# Altium PCB 12·channel amplifier.PcbDoc
Units mil, origin at the board's own origin, x right, y up, seen from the top; angles counter-clockwise.
Board outline 3455.01 x 2935.52 mil, 2 copper layers (Top Layer, Bottom Layer); 153 components, 120 nets, 438 pads, 94 vias.
Unrouted connection lines stored in the file: 39.
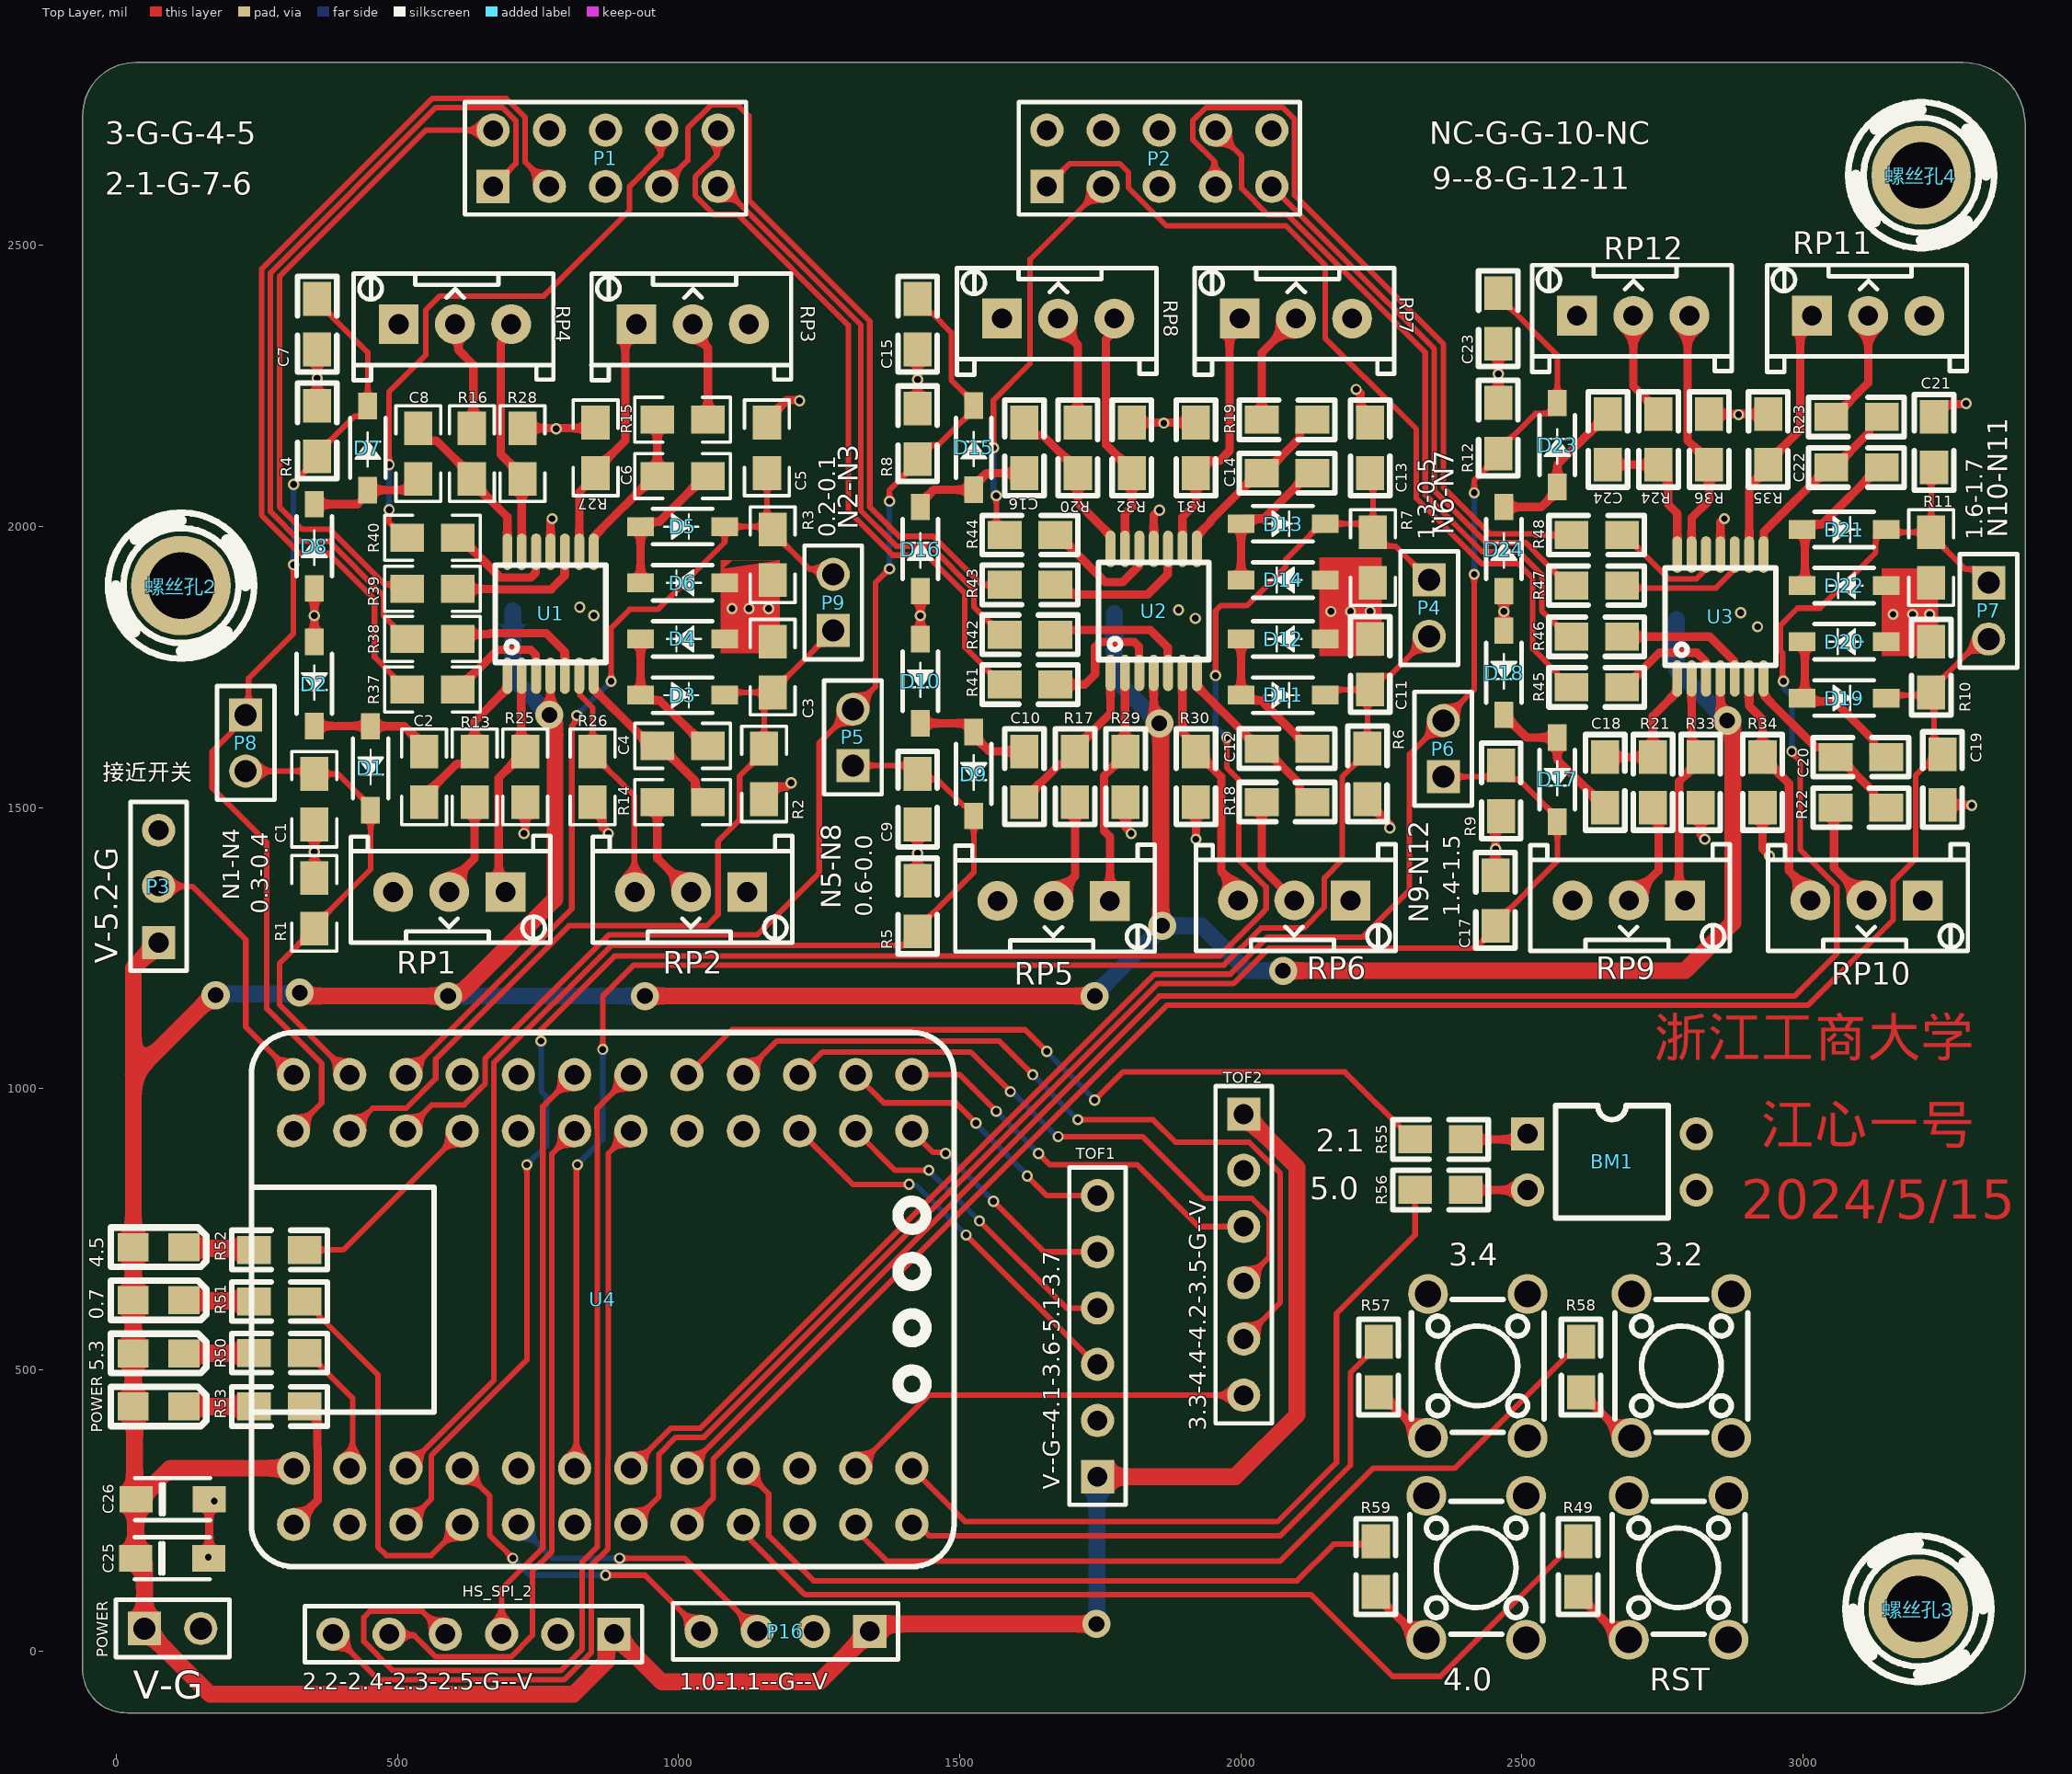
[diagram p0: Top Layer view]
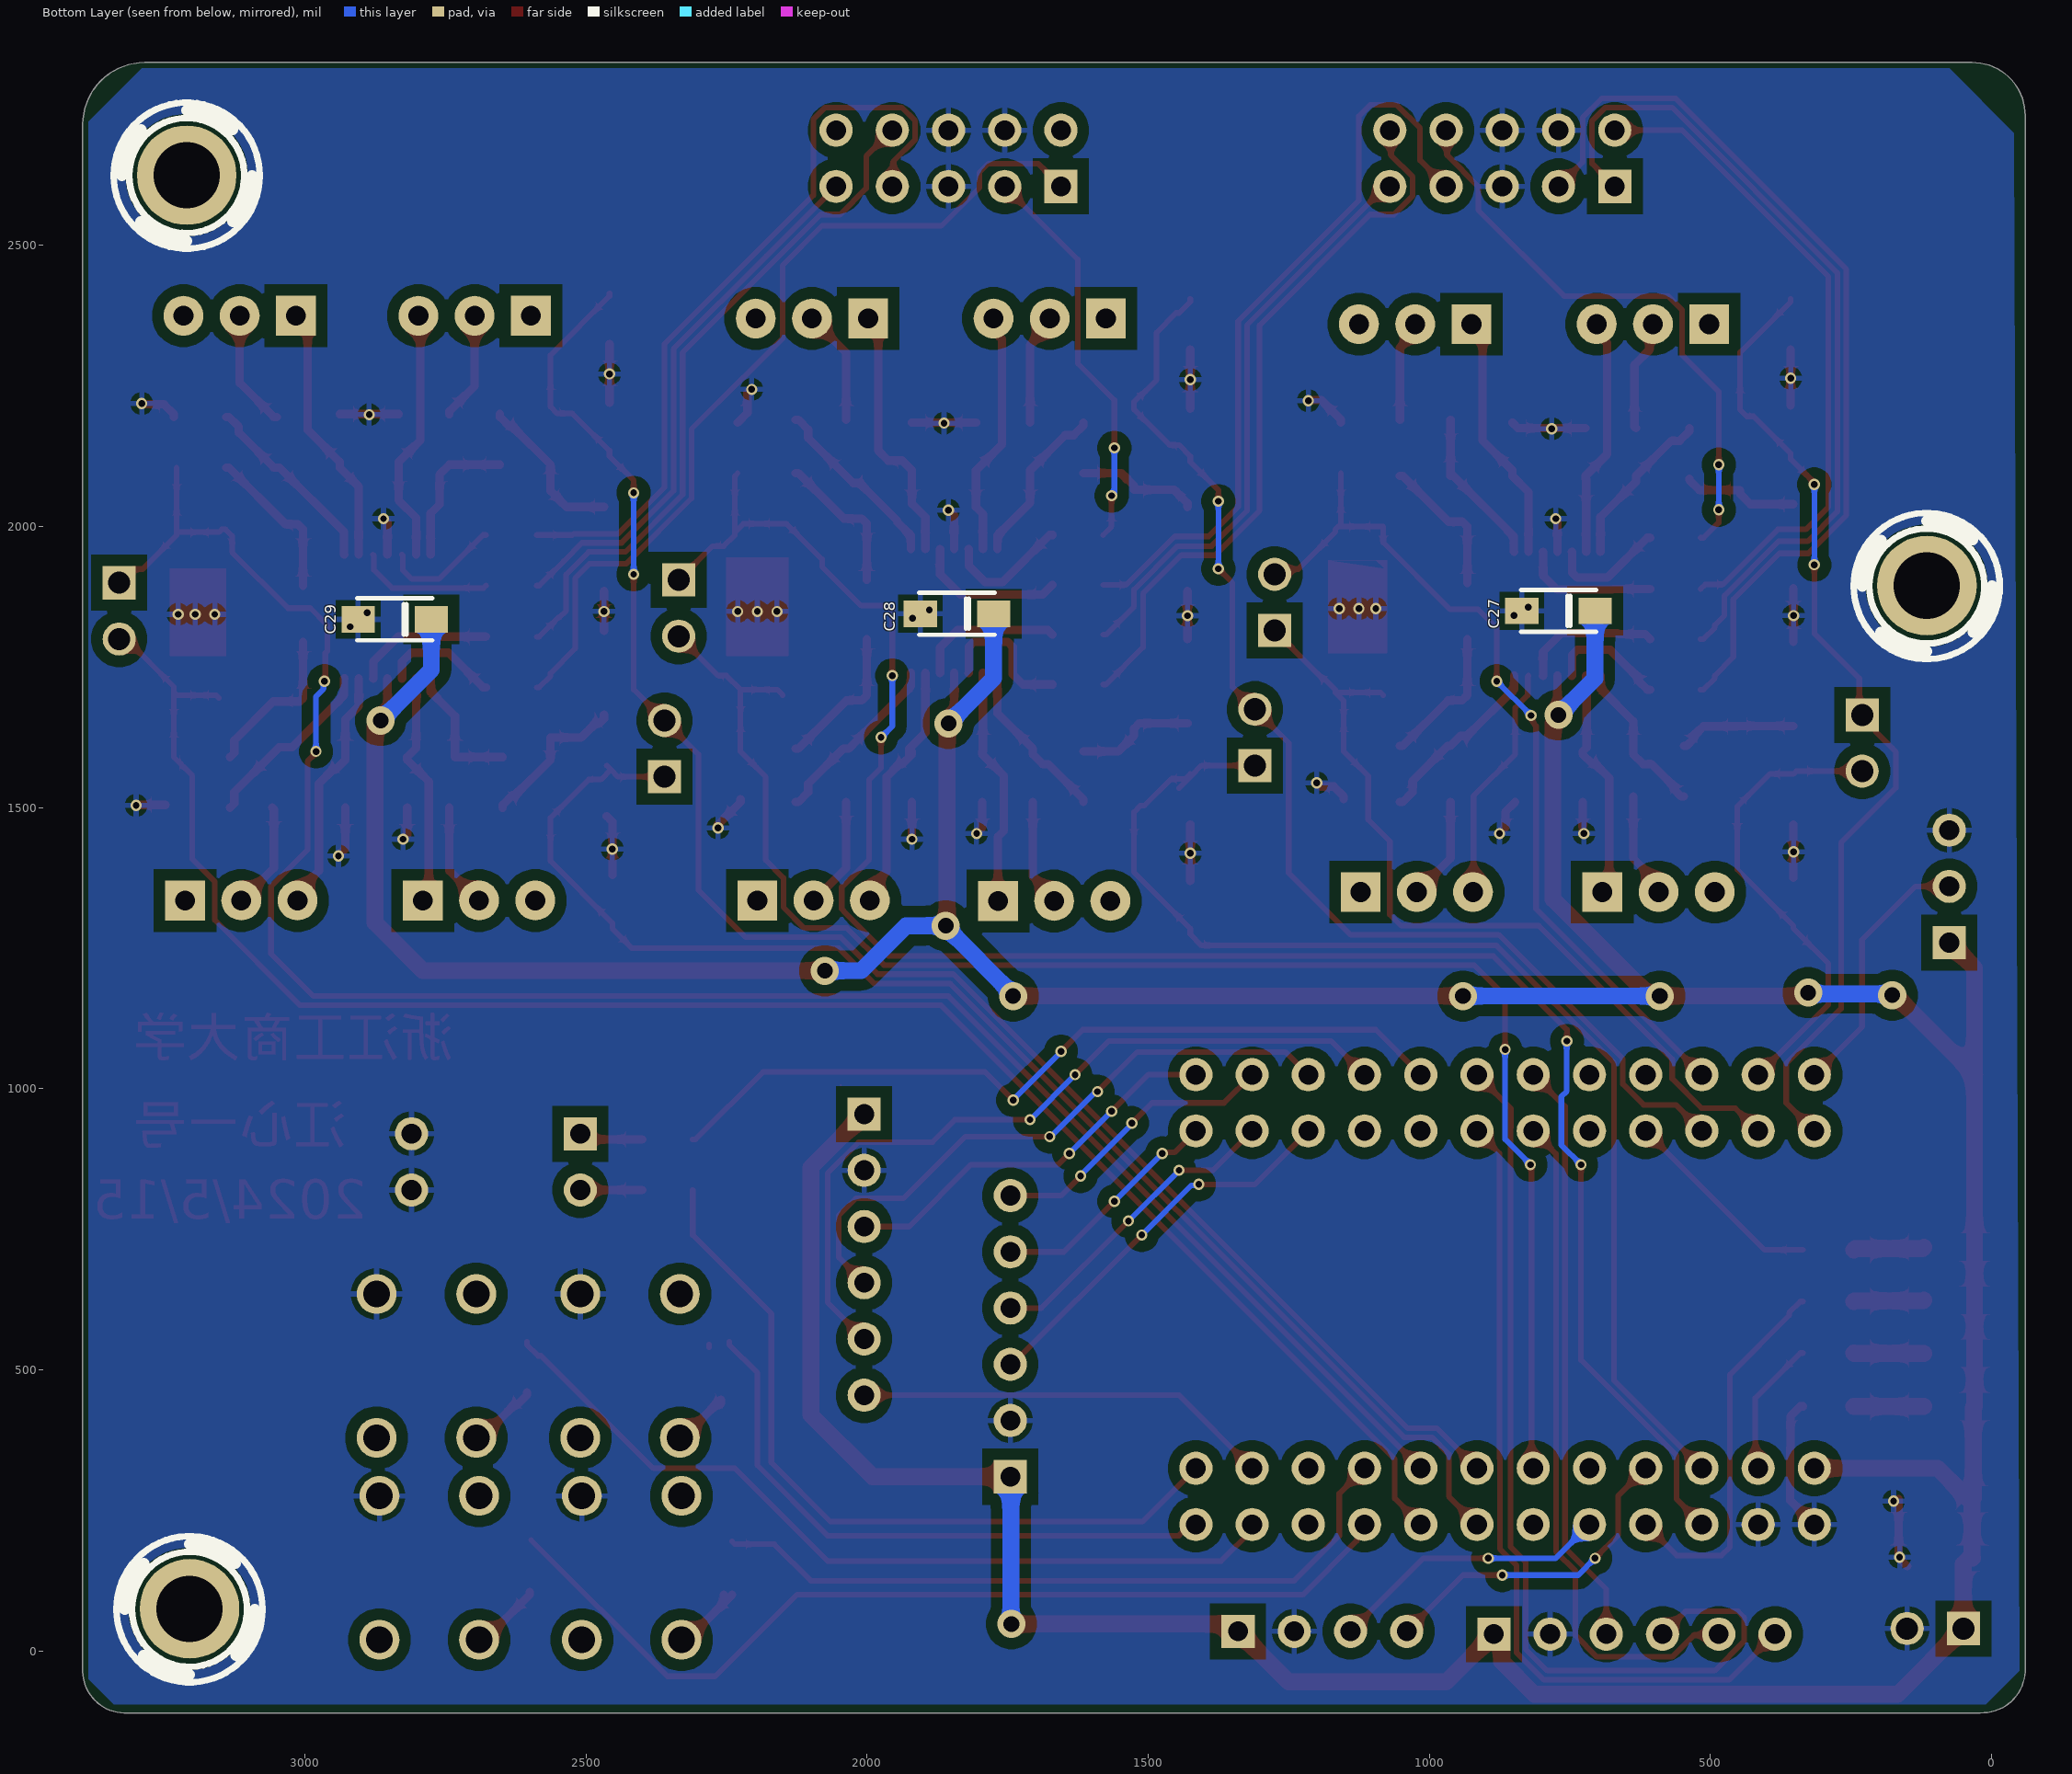
[diagram p1: Bottom Layer view, seen from below]
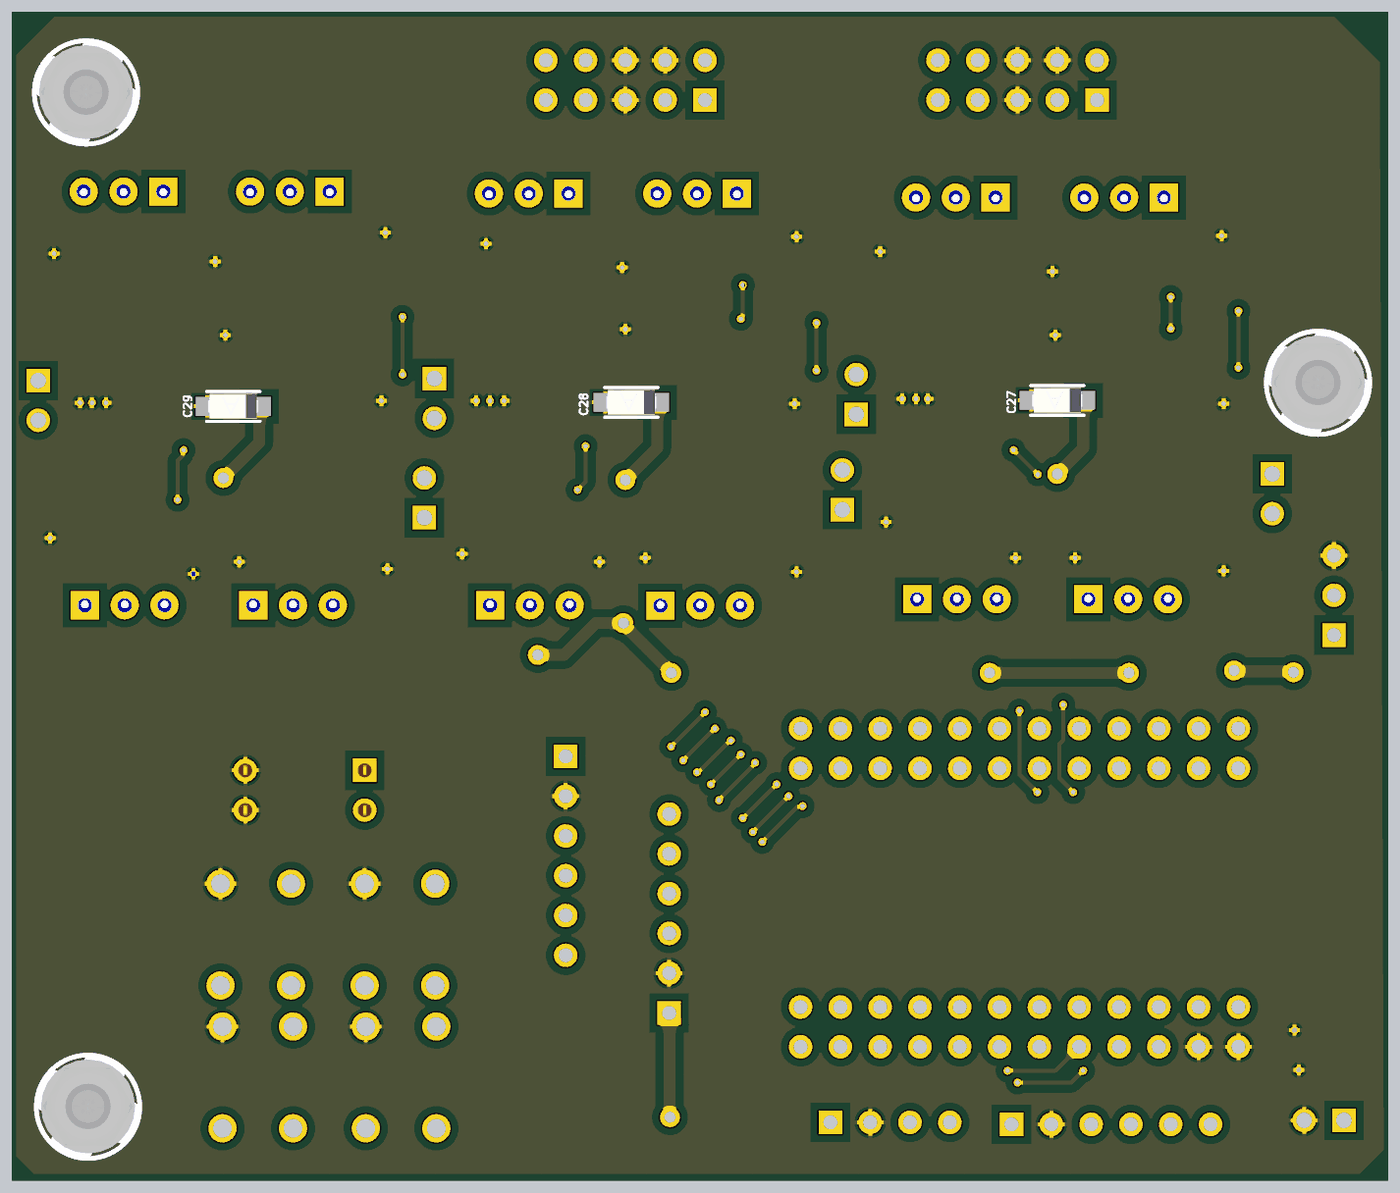
[diagram p2: 3D render of the assembled board from below, using the file's embedded part models]

## Layer stack, top to bottom
Top Solder: solder mask 0.4, Solder Resist, Dk 3.5
Top Layer: signal copper 1.4
Dielectric 1: dielectric 12.6, FR-4, Dk 4.8
Bottom Layer: signal copper 1.4
Bottom Solder: solder mask 0.4, Solder Resist, Dk 3.5

## Board outline
-60,-30 ccw(c16.79,-33.21) 20,-110 3315,-110 ccw(c3319.64,-34.64) 3395,-30 3395,2715.51 ccw(c3284.17,2714.68) 3285,2825.51 35,2825.51 ccw(c33.75,2731.76) -60,2730.51 -60,2725.92

## Design rules (kind name [scope] priority, off if disabled: settings)
Clearance [All] p1: gap=6 ignorepadtopadclearanceinfootprint=TRUE
PolygonConnect [All] p1: connectstyle=Relief reliefconductorwidth=10 reliefentries=4 polygonreliefangle="90 Angle" airgapwidth=10
RoutingVias [All] p1: holewidth=28 width=50 viastyle="Through Hole" minholewidth=28 minwidth=50 maxholewidth=28 maxwidth=50
SMDNeckDown [All] p1: percent=50.000
SolderMaskExpansion [All] p1: expansion=4 istentingtop=FALSE
UnRoutedNet [All] p1: checkbadconnections=TRUE
Width Width_1 [InNetClass('net')] p1: maxlimit=30 minlimit=10 preferedwidth=20
Width VCC [InNetClass('VCC')] p2: maxlimit=50 minlimit=10 preferedwidth=30
29 further rules are at their usual default settings.

## Components (designator, comment, footprint, x,y, rotation, side; value= is the part's Value field where it differs from the comment)
0.7 "蓝色贴片LED" 0805LED 30,623.89 r0 top (schematic designator STA2)
3.2 "TS665CJ" 圆形按键 2872.15,379.11 r90 top (schematic designator S2)
3.4 "TS665CJ" 圆形按键 2510,379.11 r90 top (schematic designator S1)
4.0 "TS665CJ" 圆形按键 2507.15,20 r90 top (schematic designator S3)
4.5 "蓝色贴片LED" 0805LED 30,718.33 r0 top (schematic designator STA3)
5.3 "蓝色贴片LED" 0805LED 30,529.44 r0 top (schematic designator STA1)
BM1 "SW DIP-2" BoMa2 2670,860 r270 top
C1 "Cap" 0805#1 352.1,1515 r270 top value=0.1uF
C2 "Cap" 0805#1 547.1,1555 r90 top value=0.1uF
C3 "Cap" 0805#1 1167.1,1750 r90 top value=0.1uF
C4 "Cap" 0805#1 1007.1,1610 r180 top value=0.1uF
C5 "Cap" 0805#1 1157.1,2140 r270 top value=0.1uF
C6 "Cap" 0805#1 1007.1,2090 r180 top value=0.1uF
C7 "Cap" 0805#2 357.1,2315 r90 top value=0.1uF
C8 "Cap" 0805#1 537.1,2130 r270 top value=0.1uF
C9 "Cap" 0805#2 1425,1560 r270 top value=0.1uF
C10 "Cap" 0805#2 1615,1510 r90 top value=0.1uF
C11 "Cap" 0805#2 2230,1710 r90 top value=0.1uF
C12 "Cap" 0805#2 2127.04,1605 r180 top value=0.1uF
C13 "Cap" 0805#2 2230,2185 r270 top value=0.1uF
C14 "Cap" 0805#2 2127.04,2095 r180 top value=0.1uF
C15 "Cap" 0805#2 1425,2315 r90 top value=0.1uF
C16 "Cap" 0805#2 1615,2185 r270 top value=0.1uF
C17 "Cap" 0805#2 2452.9,1290 r90 top value=0.1uF
C18 "Cap" 0805#2 2647.9,1590 r270 top value=0.1uF
C19 "Cap" 0805#2 3247.9,1595 r270 top value=0.1uF
C20 "Cap" 0805#2 3147.9,1590 r180 top value=0.1uF
C21 "Cap" 0805#2 3232.9,2195 r270 top value=0.1uF
C22 "Cap" 0805#2 3139.94,2105 r180 top value=0.1uF
C23 "Cap" 0805#2 2457.9,2325 r90 top value=0.1uF
C24 "Cap" 0805#2 2652.9,2110 r90 top value=0.1uF
C25 "104" CAPT3216 99.11,165 r0 top
C26 "106" CAPT3216 99.88,270 r0 top
C27 "104" CAPT3216 770.12,1850 r0 bottom
C28 "104" CAPT3216 1840,1845 r0 bottom
C29 "104" CAPT3216 2840,1835 r0 bottom
D1 "1N5819" SOD-123 452.1,1570 r270 top
D2 "1N5819" SOD-123 352.1,1720.2 r270 top
D3 "1N5819" SOD-123 1007.1,1700 r0 top
D4 "1N5819" SOD-123 1007.1,1800 r180 top
D5 "1N5819" SOD-123 1007.1,2000 r0 top
D6 "1N5819" SOD-123 1007.1,1900 r180 top
D7 "1N5819" SOD-123 447.1,2139.8 r90 top
D8 "1N5819" SOD-123 352.1,1965 r90 top
D9 "1N5819" SOD-123 1525,1560 r270 top
D10 "1N5819" SOD-123 1430,1725 r270 top
D11 "1N5819" SOD-123 2075,1700 r0 top
D12 "1N5819" SOD-123 2075,1800 r180 top
D13 "1N5819" SOD-123 2075,2005 r0 top
D14 "1N5819" SOD-123 2075,1905 r180 top
D15 "1N5819" SOD-123 1525,2140.2 r90 top
D16 "1N5819" SOD-123 1430,1960 r90 top
D17 "1N5819" SOD-123 2562.9,1550 r270 top
D18 "1N5819" SOD-123 2467.9,1740 r270 top
D19 "1N5819" SOD-123 3072.9,1695 r0 top
D20 "1N5819" SOD-123 3072.9,1795 r180 top
D21 "1N5819" SOD-123 3072.9,1995 r0 top
D22 "1N5819" SOD-123 3073.09,1895 r180 top
D23 "1N5819" SOD-123 2562.9,2145 r90 top
D24 "1N5819" SOD-123 2467.9,1960 r90 top
HS_SPI_2 "CON6" HDR1X6 885,30 r180 top
P1 "Header 5X2" HDR2X5 670,2605 r0 top
P2 "Header 5X2" HDR2X5 1655,2605 r0 top
P3 "Header 3" HDR1X3 75,1260 r90 top
P4 "HDR-1X2" CON20VP2R54-1X2TM 2335,1855 r270 top
P5 "HDR-1X2" CON20VP2R54-1X2TM 1310,1625 r90 top
P6 "HDR-1X2" CON20VP2R54-1X2TM 2360,1605 r90 top
P7 "HDR-1X2" CON20VP2R54-1X2TM 3330,1850 r270 top
P8 "HDR-1X2" CON20VP2R54-1X2TM 230,1615 r270 top
P9 "HDR-1X2" CON20VP2R54-1X2TM 1275,1865 r90 top
P16 "Header-D-M 1x4P" HDR1X4 1340,35 r180 top
POWER "蓝色贴片LED" 0805LED 30,435 r0 top (schematic designator STA4)
POWER "HDR-1X2" CON20VP2R54-1X2TM 100,40 r0 top
R1 "47K ±1%" 0805#1 352.1,1330 r270 top value=47K
R2 "47K ±1%" 0805#1 1152.1,1560 r90 top value=47K
R3 "47K ±1%" 0805#1 1167.1,1950 r270 top value=47K
R4 "47K ±1%" 0805#2 357.1,2125 r90 top value=47K
R5 "47K ±1%" 0805#2 1425,1370 r270 top value=47K
R6 "47K ±1%" 0805#2 2225,1515 r90 top value=47K
R7 "47K ±1%" 0805#1 2235,1945 r270 top value=47K
R8 "47K ±1%" 0805#2 1425,2120 r90 top value=47K
R9 "47K ±1%" 0805#2 2462.9,1485 r90 top value=47K
R10 "47K ±1%" 0805#2 3227.9,1795 r270 top value=47K
R11 "47K ±1%" 0805#1 3227.9,1945 r270 top value=47K
R12 "47K ±1%" 0805#2 2457.9,2130 r90 top value=47K
R13 "0R ±1%" 0805#1 637.1,1555 r90 top value=0R
R14 "0R ±1%" 0805#1 1007.1,1510 r0 top value=0R
R15 "0R ±1%" 0805#1 1007.1,2190 r0 top value=0R
R16 "0R ±1%" 0805#1 632.1,2130 r90 top value=0R
R17 "0R ±1%" 0805#2 1705,1510 r90 top value=0R
R18 "0R ±1%" 0805#2 2037.04,1510 r0 top value=0R
R19 "0R ±1%" 0805#2 2127.04,2190 r180 top value=0R
R20 "0R ±1%" 0805#2 1710,2095 r90 top value=0R
R21 "0R ±1%" 0805#2 2732.9,1500 r90 top value=0R
R22 "0R ±1%" 0805#2 3057.9,1500 r0 top value=0R
R23 "0R ±1%" 0805#2 3139.94,2195 r180 top value=0R
R24 "0R ±1%" 0805#2 2742.9,2110 r90 top value=0R
R25 "1K ±1%" 0805#1 727.1,1555 r90 top value=1K
R26 "1K ±1%" 0805#1 847.1,1555 r90 top value=1K
R27 "1K ±1%" 0805#1 852.1,2140 r90 top value=1K
R28 "1K ±1%" 0805#1 722.1,2130 r90 top value=1K
R29 "1K ±1%" 0805#2 1795,1510 r90 top value=1K
R30 "1K ±1%" 0805#2 1920,1510 r90 top value=1K
R31 "1K ±1%" 0805#2 1920,2095 r90 top value=1K
R32 "1K ±1%" 0805#2 1806,2095 r90 top value=1K
R33 "1K ±1%" 0805#2 2817.9,1500 r90 top value=1K
R34 "1K ±1%" 0805#2 2927.9,1500 r90 top value=1K
R35 "1K ±1%" 0805#2 2937.9,2110 r90 top value=1K
R36 "1K ±1%" 0805#2 2832.9,2110 r90 top value=1K
R37 "5.1K ±1%" 0805#1 562.1,1710 r0 top value=5.1K
R38 "5.1K ±1%" 0805#1 562.1,1800 r0 top value=5.1K
R39 "5.1K ±1%" 0805#1 562.1,1889.11 r180 top value=5.1K
R40 "5.1K ±1%" 0805#1 562.1,1980 r180 top value=5.1K
R41 "5.1K ±1%" 0805#2 1580,1719.11 r0 top value=5.1K
R42 "5.1K ±1%" 0805#2 1580,1807.74 r0 top value=5.1K
R43 "5.1K ±1%" 0805#2 1670,1896.37 r180 top value=5.1K
R44 "5.1K ±1%" 0805#2 1670,1985 r180 top value=5.1K
R45 "5.1K ±1%" 0805#2 2587.9,1714.11 r0 top value=5.1K
R46 "5.1K ±1%" 0805#2 2587.9,1804.11 r0 top value=5.1K
R47 "5.1K ±1%" 0805#2 2677.9,1895 r180 top value=5.1K
R48 "5.1K ±1%" 0805#2 2677.9,1985 r180 top value=5.1K
R49 "470R ±1%" 0805#2 2600,195 r270 top value=470R
R50 "2K ±1%" 0805#2 335,530 r180 top value=2K
R51 "2K ±1%" 0805#2 335,621.67 r180 top value=2K
R52 "2K ±1%" 0805#2 335,713.33 r180 top value=2K
R53 "2K ±1%" 0805#2 335,435 r180 top value=2K
R55 "470R ±1%" 0805#2 2310,910 r0 top value=470R
R56 "470R ±1%" 0805#2 2310,820 r0 top value=470R
R57 "470R ±1%" 0805#2 2245,550 r270 top value=470R
R58 "470R ±1%" 0805#2 2605,550 r270 top value=470R
R59 "470R ±1%" 0805#2 2240,195 r270 top value=470R
RP1 "100K" RESPOT3296 692.1,1350 r180 top
RP2 "100K" RESPOT3296 1122.1,1350 r180 top
RP3 "100K" RESPOT3296 925,2360 r0 top
RP4 "100K" RESPOT3296 502.1,2360 r0 top
RP5 "100K" RESPOT3296 1767.1,1334.11 r180 top
RP6 "100K" RESPOT3296 2195,1335 r180 top
RP7 "100K" RESPOT3296 1997.89,2370 r0 top
RP8 "100K" RESPOT3296 1575,2370 r0 top
RP9 "100K" RESPOT3296 2790,1335 r180 top
RP10 "100K" RESPOT3296 3212.9,1335 r180 top
RP11 "100K" RESPOT3296 3015.8,2375 r0 top
RP12 "100K" RESPOT3296 2597.9,2375 r0 top
RST "TS665CJ" 圆形按键 2867.15,20 r90 top
TOF1 "CON6" HDR1X6 1745,310 r90 top
TOF2 "CON6" HDR1X6 2005,955 r270 top
U1 "OPA4377" TSSOP14 772.1,1845 r0 top
U2 "OPA4377" TSSOP14 1845,1850 r0 top
U3 "OPA4377" TSSOP14 2852.9,1840 r0 top
U4 "STC32F_48P_CoreBoard" STC32F_48P 865,625 r90 top
螺丝孔2 "Scrow" LQ_SCROW3_5mm 115,1895 r0 top
螺丝孔3 "Scrow" LQ_SCROW3_5mm 3205,75 r0 top
螺丝孔4 "Scrow" LQ_SCROW3_5mm 3210,2625 r0 top

## Footprints (in the part's own frame and the unit in brackets; to place one, negate y for a bottom-side part, rotate by r counter-clockwise, add the part's x,y. Pads: shape width x height; smd on the part's side, far side on the other; paste and mask are expansions set on the pad)
0805#1 [mil]
  rect 60x50 smd: 1(-45,0) 2(45,0)
  silkscreen extent -85,-40 85,40
0805#2 [mil]
  rect 60x50 smd: 1(0,0) 2(90,0)
  silkscreen extent -40,-35 130,35
0805LED [mil]
  rect 55x50 smd: A(0,0) C(90,0)
  silkscreen extent -40,-35 130,35
BoMa2 [mm]
  rect 1.5x1.5 hole 0.9: 1(-1.524,-4.064)
  round 1.5 hole 0.9: 2(1.016,-4.064) 3(1.016,3.556) 4(-1.524,3.556)
  silkscreen extent -2.79,-2.79 2.29,2.29, body extent -3.52,-5.2 3.02,4.7, height 6.8
CAPT3216 [mm]
  rect 1.5x1.2 smd: 1(-1.654,0) 2(1.654,0)
  silkscreen extent -1.7,-0.95 1.7,0.95, body extent -1.6,-0.8 1.6,0.8, height 1.6
CON20VP2R54-1X2TM [mm]
  rect 1.5x1.5 hole 1: 1(-1.27,0)
  round 1.5 hole 1: 2(1.27,0)
  silkscreen extent -2.57,-1.3 2.57,1.3
HDR1X3 [mm] "Connector; Header; 3 Position"
  rect 1.5x1.5 hole 0.9: 1(0,0)
  round 1.5 hole 0.9: 2(2.54,0) 3(5.08,0)
  silkscreen extent -1.27,-1.27 6.35,1.27
HDR1X4 [mm] "Connector; Header; 4 Position"
  rect 1.5x1.5 hole 0.9: 1(0,0)
  round 1.5 hole 0.9: 2(2.54,0) 3(5.08,0) 4(7.62,0)
  silkscreen extent -1.27,-1.27 8.89,1.27
HDR1X6 [mm] "Connector; Header; 6 Position"
  rect 1.5x1.5 hole 0.9: 1(0,0)
  round 1.5 hole 0.9: 2(2.54,0) 3(5.08,0) 4(7.62,0) 5(10.16,0) 6(12.7,0)
  silkscreen extent -1.27,-1.27 13.97,1.27
HDR2X5 [mm] "Connector; Header; 5x2 Position"
  rect 1.5x1.5 hole 0.9: 1(0,0)
  round 1.5 hole 0.9: 2(0,2.54) 3(2.54,0) 4(2.54,2.54) 5(5.08,0) 6(5.08,2.54) 7(7.62,0) 8(7.62,2.54) 9(10.16,0) 10(10.16,2.54)
  silkscreen extent -1.27,-1.27 11.43,3.81
LQ_SCROW3_5mm [mm]
  round 4.5 hole 3: 1(0,0)
  silkscreen extent -3.3,-3.3 3.3,3.3, body extent -3,-3 3,3, height 1.3
RESPOT3296 [mm] "Thru-Hole; 3 Leads"
  rect 1.8x1.8 hole 0.9: 1(0,0)
  round 1.8 hole 0.9: 2(2.54,0) 3(5.08,0)
  silkscreen extent -2.03,-2.54 6.98,2.29, body extent -2.06,-2.44 7.14,2.36, height 12.46
SOD-123 [mm]
  rect 1.2x0.85 smd: A(-1.9,0) K(1.9,0)
  silkscreen extent -1.35,-0.8 1.35,0.8, body extent -1.85,-0.8 1.85,0.8, height 1.2
STC32F_48P [mm] "核心板"
  round 1.5 hole 0.9: 1(-10.16,13.97) 2(-7.62,13.97) 3(-10.16,11.43) 4(-7.62,11.43) 5(-10.16,8.89) 6(-7.62,8.89) 7(-10.16,6.35) 8(-7.62,6.35) 9(-10.16,3.81) 10(-7.62,3.81) 11(-10.16,1.27) 12(-7.62,1.27) 13(-10.16,-1.27) 14(-7.62,-1.27) 15(-10.16,-3.81) 16(-7.62,-3.81) 17(-10.16,-6.35) 18(-7.62,-6.35) 19(-10.16,-8.89) 20(-7.62,-8.89) 21(-10.16,-11.43) 22(-7.62,-11.43) 23(-10.16,-13.97) 24(-7.62,-13.97) 25(7.62,-13.97) 26(10.16,-13.97) 27(7.62,-11.43) 28(10.16,-11.43) 29(7.62,-8.89) 30(10.16,-8.89) 31(7.62,-6.35) 32(10.16,-6.35) 33(7.62,-3.81) 34(10.16,-3.81) 35(7.62,-1.27) 36(10.16,-1.27) 37(7.62,1.27) 38(10.16,1.27) 39(7.62,3.81) 40(10.16,3.81) 41(7.62,6.35) 42(10.16,6.35) 43(7.62,8.89) 44(10.16,8.89) 45(7.62,11.43) 46(10.16,11.43) 47(7.62,13.97) 48(10.16,13.97)
  silkscreen extent -12.07,-15.88 12.07,15.88
TSSOP14 [mm]
  oval 0.45x1.65 smd: 1(-1.95,-2.8) 2(-1.3,-2.8) 3(-0.65,-2.8) 4(0,-2.8) 5(0.65,-2.8) 6(1.3,-2.8) 7(1.95,-2.8) 8(1.95,2.8) 9(1.3,2.8) 10(0.65,2.8) 11(0,2.8) 12(-0.65,2.8) 13(-1.3,2.8) 14(-1.95,2.8)
  silkscreen extent -2.5,-2.2 2.5,2.2
圆形按键 [mm]
  round 1.8 hole 1.2: 1(0,4.5) 2(6.5,4.5) 3(0,0) 4(6.5,0)
  silkscreen extent 0.25,-0.75 6.25,5.25

## Part data
0.7 4.5 5.3 POWER: library part "LED Chip Blue", Color=Blue, Price(RMB)=0.00, Published=8-Jun-2000, Publisher="Altium Limited", Revision="July-2002: Re-released for DXP Platform."
3.2 3.4 4.0 RST: Contact Current=50mA, JLCPCB Part Class="Extended Part", LCSC Part Name="6*6*5mm 直插 轻触开关", Manufacturer="SHOU HAN(首韩)", Voltage Rating (DC)=12V, Actuator Style=圆形按钮, Add into BOM=yes, Circuit=单刀单掷, Convert to PCB=yes, Datasheet=https://atta.szlcsc.com/upload/public/pdf/source/20190521/C393938_BDABEAC600B4C55E200A80AA129B70BC.pdf, Device=TS665CJ, Manufacturer Part=TS665CJ, Mechanical Life=-, Mounting Style=直插, Supplier=LCSC, Supplier Footprint=插件, Supplier Part=C393938, Switch Height=5mm, Switch Length=6mm, Switch Width=6mm, Symbol=TS665CJ, With Lamp=-
BM1: library part "Code SW-2", "2位拨码开关", Price(RMB)=0.000, Published=24-Mar-1999, Publisher="Altium Limited", Revision="July-2002: Re-released for DXP Platform."
C1 C2 C3 C4 C5 C6 C7 C8 C9 C10 C11 C12 C13 C14 C15 C16 C17 C18 C19 C20 C21 C22 C23 C24: "Capacitor", LatestRevisionDate=17-Jul-2002, LatestRevisionNote="Re-released for DXP Platform.", PackageDescription="Radial Cap, Thru-Hole; 2 Leads; 0.3 in Pin Spacing", PackageReference=RAD-0.3, Published=8-Jun-2000, Publisher="Altium Limited"
C25 C26 C27 C28 C29: library part "Cap Tan", "Molded (Tantalum) Capacitor, 2-Leads,", Voltage=16V, Price(RMB)=0.000, Published=8-Jun-2000, Publisher="Altium Limited", Revision="July-2002: Re-released for DXP Platform."
D1 D2 D3 D4 D5 D6 D7 D8 D9 D10 D11 D12 D13 D14 D15 D16 D17 D18 D19 D20 D21 D22 D23 D24: library part "Diode 1N4148", "SMT Glass Diode, PSpice Model", Imax=500mA, PartNumber=1N5819, Price(RMB)=0.000, Published=8-Jun-2000, Publisher="Altium Limited"
P1 P2: "Header, 5-Pin, Dual row", LatestRevisionDate=17-Jul-2002, LatestRevisionNote="Re-released for DXP Platform.", Publisher="Altium Limited"
P3: "Header, 3-Pin", LatestRevisionDate=17-Jul-2002, LatestRevisionNote="Re-released for DXP Platform.", Publisher="Altium Limited"
P4 P5 P6 P7 P8 P9 POWER: library part "Header 2", "2P接插件", BOM名称=2P接插件, 学习资源=www.ooocke.com, 版权归属=源创客
P16: "1x4pin, 直插, 排针", Revision=V1.0
R1 R2 R3 R4 R5 R6 R7 R8 R9 R10 R11 R12: library part Res-Chip_2, "贴片电阻", Tolerance=±1%, Price(RMB)=0.000, Published=8-Jun-2000, Publisher="Altium Limited", Revision="July-2002: Re-released for DXP Platform."
R13 R14 R15 R16 R17 R18 R19 R20 R21 R22 R23 R24 R25 R26 R27 R28 R29 R30 R31 R32 R33 R34 R35 R36 R49 R55 R56 R57 R58 R59: library part Res-Chip, "贴片电阻", Tolerance=±1%, Price(RMB)=0.000, Published=8-Jun-2000, Publisher="Altium Limited", Revision="July-2002: Re-released for DXP Platform."
R37 R38 R39 R40 R41 R42 R43 R44 R45 R46 R47 R48: library part Res-Chip_1, "贴片电阻", Tolerance=±1%, Price(RMB)=0.000, Published=8-Jun-2000, Publisher="Altium Limited", Revision="July-2002: Re-released for DXP Platform."
R50 R51 R52 R53: library part Res-Chip_4, "贴片电阻", Power=1/8W, Tolerance=±1%, Revision=V1.0
RP1 RP2 RP3 RP4 RP5 RP6 RP7 RP8 RP9 RP10 RP11 RP12: library part "Res Adj 3p", "Potentiometer", Price(RMB)=0.000, Published=8-Jun-2000, Publisher="Altium Limited", Revision="July-2002: Re-released for DXP Platform.", Set Position=0.5
U1 U2 U3: library part OPA4348
U4: "逐飞科技STC32F核心板"

## Via types
v1: diameter 20, hole 12.01, Top Layer to Bottom Layer, 83 vias
v2: diameter 50, hole 28, Top Layer to Bottom Layer, 11 vias

## Nets (pads, with @x,y where several pads share a name; then routed paths per layer and width w, separated by ;. In a path a pad name is that pad's centre, name@x,y a point inside that pad or via, vN(x,y) a via of type N, cw(c..) or ccw(c..) an arc to the next point about the centre after c; other vN are vias at no path point)
0.0: C15.2 D15.K P5.2 R8.1 U4.43 | length 2141.4
  Top Layer w10: U4.43 561.3,971.3 618.61,971.3 655.53,1008.21 655.53,1053.16 876.37,1274 1140,1274 1250,1384 1250,1615 1350,1715 1350,1900 v1(1375,1925) ; v1(1375,2045) 1375,2065 1425,2115 R8.1 1425,2125 1445,2145 1461.89,2145 1525,2208.11 1525,2221.89 1513.26,2233.62 1511.98,2233.62 1485,2260.61 1485,2345 1450,2380 1445,2380 1425,2400 C15.2
  Bottom Layer w10: v1(1375,1925) v1(1375,2045)
0.1: C5.2 D5.K P9.2 R3.1 U4.44 | length 1566.4
  Top Layer w10: U4.44 810,1320 810,1644.92 ccw(c792.79,1662.13) 817.13,1662.13 v1(819.04,1664.04) ; v1(880,1725) 880,1820 912.65,1852.65 962.65,1852.65 1081.91,1971.91 D5.K 1157.1,2000 R3.1@1162.1,2000 ; C5.2 1157.1,2005 R3.1@1162.1,2000 ; P9.2 1265.61,1924.39 1232.72,1924.39 1167.1,1990 R3.1 R3.1@1162.1,2000
  Bottom Layer w10: v1(819.04,1664.04) v1(880,1725)
0.2: C3.1 D3.K P9.1 R2.2 U4.45 | length 1513.9
  Top Layer w10: U4.45 455.53,965.53 515.53,965.53 567.93,1017.93 567.93,1052.93 805,1290 1050,1290 1070,1310 1070,1440 1108.55,1478.55 1108.55,1556.45 1152.1,1600 R2.2 1152.1,1690 C3.1 ; D3.K 1086.9,1705 C3.1 ; P9.1 1190,1730 1187.1,1730 1167.1,1710 C3.1
0.3: C1.1 D1.K P8.2 R1.2 U4.46 | length 844.2
  Top Layer w10: P8.2 347.1,1565 C1.1 394.19,1560 452.1,1502.09 D1.K 452.1,1390 352.1,1290 R1.2 290,1222.9 290,1150 U4.46
0.4: C7.2 D7.K P8.1 R4.1 U4.47 | length 1742.4
  Top Layer w10: U4.47 365,975 365,1045 267.5,1142.5 267.5,1437.5 170,1535 170,1599.67 175.86,1605.53 205.47,1635.14 205.47,1640.47 235,1670 235,1730 314.99,1809.99 v1(314.99,1932.09) ; v1@316,2075 316,2078.9 357.1,2120 R4.1 357.1,2130 423.09,2195.99 435.37,2195.99 447.1,2207.72 D7.K 447.1,2310 357.1,2400 C7.2
  Bottom Layer w10: v1@315,1930 v1(315,2075)
0.5: C13.2 D13.K P4.1 R7.1 U4.5 | length 3537.8
  Top Layer w10: U4.5 560,270 560,347.37 730,517.37 v1(730,865) ; v1(755,1085) 755,1105 886,1236 1961.66,1236 2041.43,1315.77 2041.43,1316.43 2045,1320 2045,1358.83 1996.04,1407.79 1996.04,1550.12 1975,1571.16 v1(1975,1625) ; v1(1955,1735) 1955,1850 1964.34,1859.34 2010.44,1859.34 2079.77,1928.67 2079.77,1941.86 2142.91,2005 D13.K 2220,2005 R7.1 ; C13.2 2235,2090 R7.1 ; P4.1 2275,1965 2255,1965 2235,1985 R7.1
  Bottom Layer w10: v1(730,865) 765,900 765,986.15 755.53,995.62 755.53,1084.47 v1(755,1085) ; v1(1955,1735) 1955,1645 v1(1975,1625)
0.6: C9.1 D9.K P5.1 R5.2 U4.6 | length 2172.7
  Top Layer w10: U4.6 671.53,481.53 671.53,1046.53 880,1255 1405,1255 1425,1275 1425,1285 1525,1385 1525,1492.09 1513.26,1503.82 1506.37,1503.82 1459.14,1551.05 1433.94,1551.05 C9.1 ; P5.1 1405,1575 1422.5,1557.5 C9.1@1445,1535
0.7: R51.1 U4.7 | length 672.4
  Top Layer w10: R51.1 340,621.67 360,601.67 360,596.67 465,491.67 465,185 480,170 560,170 U4.7
1.0: P16.4 U4.8 | length 586.1
  Top Layer w10: U4.8 663.74,276.26 663.74,206.26 v1(705,165) ; v1(870,135) 940,135 P16.4
  Bottom Layer w10: v1(705,165) 735,135 v1(870,135)
1.1: P16.3 U4.9 | length 503.7
  Top Layer w10: v1(895,165) 1010,165 P16.3
  Bottom Layer w10: U4.9 775,165 v1(895,165)
1.3: C11.1 D11.K P4.2 R6.2 U4.12 | length 2857.1
  Top Layer w10: U4.12 818.09,328.09 818.09,863.09 v1(820,865) ; v1(865,1070) 865,1165 920,1220 1970,1220 2036,1286 2111.66,1286 2148.56,1322.9 2148.56,1374.99 2180,1406.43 2180,1555 2225,1600 R6.2 C11.1@2225,1710 ; D11.K 2159.8,1710 C11.1@2225,1710 ; P4.2 2265,1735 2250,1735 C11.1@2225,1710
  Bottom Layer w10: v1(820,865) 865,910 v1(865,1070)
1.4: C17.1 D17.K P6.1 R9.2 U4.13 | length 2517.6
  Top Layer w10: U4.13 965,275 965,350 995,380 1045,380 1852,1187 1987,1187 2050,1250 2417.9,1250 2452.9,1285 2452.9,1295 2562.9,1405 2562.9,1482.09 2494.98,1550 2472.9,1550 R9.2@2455.4,1567.5 ; P6.1 2442.9,1555 R9.2@2455.4,1567.5 ; R9.2 R9.2@2455.4,1567.5
1.5: C23.2 D23.K P6.2 R12.1 U4.14 | length 3040.7
  Top Layer w10: U4.14 986,396 1038.37,396 1846.37,1204 1981.37,1204 2047.37,1270 2216.42,1270 2300,1353.58 2300,1595 P6.2 2415,1710 v1(2415,1915) ; v1(2415,2060) 2415,2082.1 2457.9,2125 R12.1 2457.9,2135 2524.08,2201.18 2551.17,2201.18 2562.9,2212.91 D23.K 2562.9,2305 2457.9,2410 C23.2
  Bottom Layer w10: v1(2415,1915) v1(2415,2060)
1.6: C19.1 D19.K P7.2 R10.2 U4.15 | length 3289.6
  Top Layer w10: U4.15 1061.3,271.3 1061.3,341.3 1869,1149 3009,1149 3160,1300 3160,1368.52 3200,1408.52 3200,1557.1 3232.9,1590 3232.9,1595 3232.9,1700 3232.9,1715 3317.9,1800 P7.2 ; D19.K@3152.7,1695 3157.7,1700 3227.9,1700 R10.2@3230.4,1702.5
1.7: C21.2 D21.K P7.1 R11.1 U4.16 | length 3665.2
  Top Layer w10: U4.16 1855,1165 2985,1165 3060,1240 3060,1360 2995,1425 2995,1582.29 2980,1597.29 v1(2980,1600) ; v1(2965,1725) 2963.47,1726.53 2963.47,1775.38 2960,1778.85 2960,1825 2990,1855 3030,1855 3129.08,1954.08 3129.08,1983.27 3140.81,1995 D21.K 3152.7,1990 R11.1 ; C21.2@3227.9,2105 R11.1 ; P7.1 3305.47,1924.53 3288.37,1924.53 3227.9,1985 R11.1
  Bottom Layer w10: v1(2965,1725) 2966.91,1723.09 2966.91,1710.66 2980,1697.57 v1(2980,1600)
2.1: R55.1 U4.34 | length 1451.1
  Top Layer w10: U4.34 1095,1105 1616.35,1105 v1(1655,1066.35) ; v1(1740,980) 1790,1030 2185,1030 2305,910 R55.1
  Bottom Layer w10: v1(1655,1066.35) 1655,1065.68 1740,980.68 v1(1740,980)
2.2: HS_SPI_2.6 U4.35 | length 1470.2
  Top Layer w10: HS_SPI_2.6 466,-51 796.63,-51 844.47,-3.15 844.47,151.85 874.47,181.85 874.47,341.79 875,342.31 875,885 U4.35
2.3: HS_SPI_2.4 U4.36 | length 1692.9
  Top Layer w10: HS_SPI_2.4 544.47,70.53 450.53,70.53 440,60 440,17 492,-35 790,-35 828.47,3.47 828.47,158.47 855.53,185.53 855.53,930.99 855,931.52 855,965 U4.36
2.4: HS_SPI_2.5 U4.37 | length 1216
  Top Layer w10: HS_SPI_2.5 486.84,28.16 529.53,28.16 568.21,-10.53 701.79,-10.53 740,27.69 740,142.37 774.47,176.85 774.47,884.47 U4.37
2.5: HS_SPI_2.3 U4.38 | length 1048.8
  Top Layer w10: HS_SPI_2.3 685,110 758.47,183.47 758.47,968.47 U4.38
3.2: R58.1 U4.21 | length 1487.3
  Top Layer w10: U4.21 1315,215 1370,160 2070,160 2235,325 2380,325 2580,525 2585,525 2605,545 R58.1
3.3: TOF2.6 U4.22 | length 743.8
  Top Layer w10: U4.22 1445,455 TOF2.6
3.4: R57.1 U4.23 | length 1080.8
  Top Layer w10: U4.23 1425.39,225 1445.39,205 2070,205 2195,330 2195,495 2245,545 R57.1
3.5: TOF2.3 U4.26 | length 701.8
  Top Layer w10: U4.26 1500,1025 v1(1565,960) ; v1(1640,885) 1660,865 1815,865 1925,755 TOF2.3
  Bottom Layer w10: v1(1565,960) v1(1640,885)
3.6: TOF1.4 U4.27 | length 560.5
  Top Layer w10: U4.27 1385,855 v1(1445,855) ; v1(1535,765) 1690,610 TOF1.4
  Bottom Layer w10: v1(1445,855) v1(1535,765)
3.7: TOF1.6 U4.28 | length 520.8
  Top Layer w10: U4.28 1365,975 1493,975 v1(1529,939) ; v1(1620,845) 1655,810 TOF1.6
  Bottom Layer w10: v1(1529,939) 1529,937.5 1620,846.5 v1(1620,845)
4.0: R59.1 U4.18 | length 1280.8
  Top Layer w10: U4.18 1160,280 1160,205 1240,125 2100,125 2165,190 2235,190 R59.1
4.1: TOF1.3 U4.29 | length 701.9
  Top Layer w10: U4.29 1310,830 v1(1410,830) ; v1(1511.25,740) 1741.25,510 TOF1.3
  Bottom Layer w10: v1(1410,830) 1411.91,828.09 1423.16,828.09 v1(1511.25,740)
4.2: TOF2.4 U4.30 | length 1110.8
  Top Layer w10: U4.30 1215.51,1025 1256.04,1065.53 1519.47,1065.53 v1(1590,995) ; v1(1675,915) 1825,915 1935,805 2020,805 2050,775 2050,700 TOF2.4
  Bottom Layer w10: v1(1590,995) 1592.5,995 1672.5,915 v1(1675,915)
4.4: TOF2.5 U4.32 | length 1399.1
  Top Layer w10: U4.32 1175,1085 1570,1085 v1(1630,1025) ; v1(1710,945) 1843.85,945 1883.85,905 2015,905 2070,850 2070,620 TOF2.5
  Bottom Layer w10: v1(1630,1025) v1(1710,945)
4.5: R52.1 U4.41 | length 367.7
  Top Layer w10: R52.1 403.33,713.33 U4.41
5.0: R56.1 U4.24 | length 1380.8
  Top Layer w10: U4.24 1510,230 2065,230 2170,335 2170,600 2310,740 R56.1
5.1: TOF1.5 U4.25 | length 419.1
  Top Layer w10: U4.25 1453.09,886.91 1473.09,886.91 v1(1475,885) ; v1(1560,800) 1650,710 TOF1.5
  Bottom Layer w10: v1(1475,885) v1(1560,800)
5.2: P3.2 U4.48 | length 469.6
  Top Layer w10: P3.2 135,1360 230,1265 230,1110 U4.48
5.3: R50.1 U4.4 | length 245.2
  Top Layer w10: R50.1 340,530 420,450 420,330 U4.4
GND: 3.2.4 3.4.4 4.0.4 BM1.3 BM1.4 C1.2 C3.2 C5.1 C7.1 C9.2 C11.2 C13.1 C15.1 C17.2 C19.2 C21.1 C23.1 C25.2 C26.2 C27.2 C28.2 C29.2 D2.A D4.A D6.A D8.A D10.A D12.A D14.A D16.A D18.A D20.A D22.A D24.A HS_SPI_2.2 P1.4 P1.5 P1.6 P2.4 P2.5 P2.6 P3.3 P16.2 POWER.2 R1.1 R2.1 R3.2 R4.2 R5.1 R6.1 R7.2 R8.2 R9.1 R10.1 R11.2 R12.2 R25.1 R26.1 R27.2 R28.2 R29.1 R30.1 R31.2 R32.2 R33.1 R34.1 R35.2 R36.2 R53.1 RST.4 TOF1.2 TOF2.2 U1.11 U2.11 U3.11 U4.1 U4.3 | length 2581.2
  Top Layer w15: C25.2@150,150.78 C25.2 165,165.78 C26.2 ; U4.1 358.03,268.03 358.03,362.07 357.5,362.6 357.5,417.5 340,435 R53.1 ; R1.1 C1.2 ; D2.A D8.A ; R4.2 C7.1 ; R28.2 842.1,2175 R27.2 ; v1@725,1455 727.1,1457.1 R25.1 ; U1.11 772.1,2012.1 v1@775,2015 ; R26.1 864.6,1492.5 864.6,1465.4 v1@875,1455 ; R2.1 1152.1,1520 1169.6,1537.5 1192.5,1537.5 v1@1200,1545 ; C5.1 1157.1,2190 1192.1,2225 v1@1215,2225 ; R5.1 C9.2 ; R8.2 C15.1 ; D10.A D16.A ; R29.1 1795,1465 v1@1805,1455 ; R32.2 R31.2 ; U2.11 1845,2020 v1@1855,2030 ; v1@1920,1445 R30.1 ; v1@2205,2245 2212.5,2237.5 2212.5,2202.5 C13.1 ; R6.1 2225,1510 2265,1470 v1@2265,1465 ; C17.2 2452.9,1475 R9.1 ; R12.2 C23.1 ; D18.A D24.A ; R33.1 2817.9,1452.1 v1@2825,1445 ; R36.2 R35.2 ; U3.11 2852.9,2007.9 v1@2860,2015 ; R34.1 2927.9,1427.1 v1@2940,1415 ; C21.1 3232.9,2200 3250.4,2217.5 3287.5,2217.5 v1@3290,2220 ; C19.2 v1@3300,1505
  other v1: 163.3,166.75 174.08,266.75 2940.03,1414 1425.03,1419 352.13,1421.5 2452.93,1426.5 1920.03,1444 2825.03,1444 725.03,1454 875.03,1454 1805.03,1454 2265.03,1464 3300.03,1504 1200.03,1544 2919.08,1821.75 1919.08,1836.75 352.13,1841.6 849.08,1841.75 1430.03,1841.5 3160.03,1844 3195.03,1844 3225.03,1844 2889.08,1846.75 2160.03,1849 2195.03,1849 2230.03,1849 2467.93,1849 1889.08,1851.75 1095.03,1854 1125.03,1854 1160.03,1854 824.08,1856.75 775.03,2014 2860.03,2014 1855.03,2029 782.13,2174 1863.03,2184 2885.43,2199 3290.03,2219 1215.03,2224 2205.03,2244 1425.03,2261.5 357.13,2264 2457.93,2271.5
IN1: P1.3 R37.1 | length 1638
  Top Layer w10: R37.1 512.1,1710 492.1,1730 492.1,1735 459,1768.1 459,1870.75 377.37,1952.37 325.63,1952.37 258,2020 258,2458 561.53,2761.53 693.41,2761.53 727.01,2727.93 727.01,2647.99 P1.3
IN2: P1.1 R38.1 | length 1487.1
  Top Layer w10: R38.1 512.1,1800 492.1,1820 492.1,1825 475,1842.1 475,1877.37 378.69,1973.69 326.94,1973.69 274,2026.63 274,2451.37 568.15,2745.53 686.79,2745.53 710.53,2721.79 710.53,2645.53 P1.1
IN3: P1.2 R39.2 | length 1185.1
  Top Layer w10: R39.2 509.17,1897.04 477.96,1897.04 380,1995 330,1995 290,2035 290,2444.75 550.25,2705 P1.2
IN4: P1.8 R40.2 | length 1050.5
  Top Layer w10: v1(485,2030) 485,2007.1 512.1,1980 R40.2 ; v1(485,2110) 485,2240 550,2305 550,2385 575,2410 760,2410 912.81,2562.81 912.81,2605.12 968.16,2660.47 968.16,2703.16 P1.8
  Bottom Layer w10: v1(485,2030) v1(485,2110)
IN5: P1.10 R41.1 | length 1293.7
  Top Layer w10: P1.10 1068.16,2703.16 1068.16,2660.47 1029.47,2621.79 1029.47,2588.21 1062.69,2555 1105,2555 1301.69,2358.31 1301.69,2028.06 1380.75,1949 1441,1949 1509,1881 1509,1785.1 1575,1719.11 R41.1
IN6: P1.9 R42.1 | length 1051.2
  Top Layer w10: P1.9 1077.63,2605 1324,2358.63 1324,2028.37 1387.37,1965 1447.63,1965 1525,1887.63 1525,1857.73 1575,1807.74 R42.1
IN7: P1.7 R43.2 | length 1338.4
  Top Layer w10: P1.7 1016.3,2651.3 1016.3,2708.61 1057.69,2750 1105,2750 1125,2730 1125,2580.25 1340,2365.25 1340,2035 1392.37,1982.63 1452.63,1982.63 1538.89,1896.37 R43.2
IN8: P2.3 R44.2 | length 709.1
  Top Layer w10: v1(1560,2140) 1560,2225 1625,2290 1625,2475 P2.3 ; v1(1565,2055) 1565,2000 R44.2
  Bottom Layer w10: v1(1560,2140) 1560,2060 v1(1565,2055)
IN9: P2.1 R45.1 | length 1576.2
  Top Layer w10: P2.1 1695.53,2645.53 1784.47,2645.53 1800,2630 1800,2602.69 1867.69,2535 2079.75,2535 2150,2464.75 2150,2335 2220.22,2264.78 2220.78,2264.78 2312,2173.55 2312,2050.12 2428.43,1933.69 2493.69,1933.69 2519,1908.37 2519,1783 2562.9,1739.11 2562.9,1734.11 2582.9,1714.11 R45.1
IN10: P2.8 R46.1 | length 1225.7
  Top Layer w10: P2.8 2001.3,2658.7 2001.3,2601.39 2047.69,2555 2082.37,2555 2328,2309.37 2328,2056.75 2429.75,1955 2495,1955 2535,1915 2535,1850 2546.75,1838.25 2548.76,1838.25 2582.9,1804.11 R46.1
IN11: P2.9 R47.2 | length 975
  Top Layer w10: P2.9 2179.23,2480.77 2344,2316 2344,2063.37 2436.37,1971 2506.9,1971 2539.33,1938.56 2582.9,1895 R47.2
IN12: P2.7 R48.2 | length 1360.3
  Top Layer w10: P2.7 1953.16,2606.84 1953.16,2649.53 1914.47,2688.21 1914.47,2721.79 1938.21,2745.53 2074.47,2745.53 2095,2725 2095,2722.31 2095.53,2721.79 2095.53,2589.47 2360,2325 2360,2070 2443,1987 2522.4,1987 2524.4,1985 R48.2
NetBM1_1: BM1.1 R55.2 | length 114.1
  Top Layer w15: R55.2 2500,910 BM1.1
NetBM1_2: BM1.2 R56.2 | length 110
  Top Layer w15: R56.2 BM1.2
NetC2_1: C2.1 R13.2 U1.1 | length 287.9
  Top Layer w15: C2.1@547.1,1520 552.1,1520 564.6,1532.5 564.6,1537.5 604.6,1577.5 619.6,1577.5 637.1,1595 637.1,1610 637.1,1653.65 693.24,1709.78 695.33,1711.88 U1.1
NetC2_2: C2.2 D1.A D2.K | length 212.6
  Top Layer w15: D2.K 451.51,1645.39 D1.A 512.3,1644.8 529.6,1627.5 529.6,1622.5 542.1,1610 C2.2@547.1,1610
NetC4_1: C4.1 D3.A D4.K | length 257.1
  Top Layer w15: D4.K D3.A 941.53,1690.77 966.33,1690.77 1047.1,1610 C4.1
NetC4_2: C4.2 R14.2 U1.7 | length 321.9
  Top Layer w15: U1.7 848.87,1711.14 932.52,1627.5 944.6,1627.5 C4.2 967.1,1610 1029.6,1547.5 1029.6,1527.5 1047.1,1510 R14.2
NetC6_1: C6.1 D5.A D6.K | length 257.1
  Top Layer w15: D6.K D5.A 940.98,2008.69 965.79,2008.69 1047.1,2090 C6.1
NetC6_2: C6.2 R15.1 U1.8 | length 284.6
  Top Layer w15: U1.8 849.39,1955.76 849.39,1982.29 957.1,2090 C6.2 R15.1
NetC8_1: C8.1 R16.1 U1.14 | length 294.1
  Top Layer w15: C8.1 537.1,2170 554.6,2152.5 569.6,2152.5 632.1,2090 R16.1 632.1,2080 695.33,2016.77 U1.14
NetC8_2: C8.2 D7.A D8.K | length 209.2
  Top Layer w15: D8.K 428.8,2039.8 447.1,2058.11 D7.A 519.6,2065 537.1,2082.5 C8.2
NetC10_1: C10.1 R17.2 U2.1 | length 299.1
  Top Layer w15: C10.1 1615,1515 1677.5,1577.5 1687.5,1577.5 1705,1595 R17.2 1705,1605 1768.22,1668.23 U2.1
NetC10_2: C10.2 D9.A D10.K | length 213.4
  Top Layer w15: D10.K 1515.76,1650.2 1525,1640.96 D9.A 1525,1627.91 1552.91,1600 C10.2
NetC12_1: C12.1 D11.A D12.K | length 266.2
  Top Layer w15: D12.K D11.A 2009.43,1690.77 2036.28,1690.77 2122.04,1605 C12.1
NetC12_2: C12.2 R18.2 U2.7 | length 323.6
  Top Layer w15: U2.7 1921.77,1716.14 2014.54,1623.37 2014.54,1622.5 2032.04,1605 C12.2 2042.04,1605 2104.54,1542.5 2104.54,1527.5 2122.04,1510 R18.2
NetC14_1: C14.1 D13.A D14.K | length 264.1
  Top Layer w15: D14.K D13.A 2009.43,2014.23 2041.28,2014.23 2122.04,2095 C14.1
NetC14_2: C14.2 R19.1 U2.8 | length 324.3
  Top Layer w15: U2.8 1921.77,1983.86 1946.63,2008.72 1946.63,2010.89 2013.25,2077.5 2024.54,2077.5 2104.54,2157.5 2104.54,2172.5 2122.04,2190 R19.1
NetC16_1: C16.1 R20.1 U2.14 | length 297
  Top Layer w15: C16.1 1615,2180 1632.5,2162.5 1647.5,2162.5 1710,2100 R20.1 1710,2042.09 1768.22,1983.86 U2.14
NetC16_2: C16.2 D15.A D16.K | length 218
  Top Layer w15: D16.K 1430,2041.69 1453.7,2065.39 D15.A 1525,2072.28 1547.71,2095 C16.2
NetC18_1: C18.1 R21.2 U3.1 | length 242.7
  Top Layer w15: C18.1 R21.2 2732.9,1662.91 2776.13,1706.14 U3.1
NetC18_2: C18.2 D17.A D18.K | length 278.7
  Top Layer w15: D18.K 2467.9,1658.31 2477.13,1649.07 2484.02,1649.07 2508.29,1624.8 D17.A 2562.9,1585 2625.4,1522.5 2630.4,1522.5 2647.9,1505 C18.2
NetC20_1: C20.1 D19.A D20.K | length 286.2
  Top Layer w15: D20.K@3003.09,1795 3003.09,1695 3009.28,1688.81 3056.19,1688.81 3125.4,1619.6 3125.4,1597.5 C20.1@3132.9,1590
NetC20_2: C20.2 R22.2 U3.7 | length 327.4
  Top Layer w15: U3.7 2930.19,1729.24 2930.19,1699.81 3022.5,1607.5 3045.4,1607.5 3125.4,1527.5 3125.4,1507.5 R22.2@3132.9,1500
NetC22_1: C22.1 D21.A D22.K | length 282.5
  Top Layer w15: D22.K@3003.29,1895 3003.29,1994.8 3003.09,1995 3012.33,2004.23 3034.18,2004.23 3134.94,2105 C22.1
NetC22_2: C22.2 R23.1 U3.8 | length 340.6
  Top Layer w15: U3.8 2930.19,1950.76 2930.19,1990.24 3044.94,2105 C22.2 3054.94,2105 3117.44,2167.5 3117.44,2177.5 3134.94,2195 R23.1
NetC24_1: C24.1 R24.1 U3.14 | length 263.5
  Top Layer w15: C24.1 R24.1 2760.4,2092.5 2760.4,2039.17 2776.13,2023.44 U3.14
NetC24_2: C24.2 D23.A D24.K | length 283.7
  Top Layer w15: D24.K 2534.39,2034.8 2562.9,2063.31 D23.A 2562.9,2110 2630.4,2177.5 2635.4,2177.5 2652.9,2195 C24.2
NetR13_1: R13.1 RP1.2 | length 188.6
  Top Layer w15: RP1.2 592.1,1365.12 637.1,1410.12 R13.1@637.1,1520
NetR14_1: R14.1 RP2.2 | length 184.9
  Top Layer w15: R14.1 962.1,1410 RP2.2
NetR15_2: R15.2 RP3.2 | length 181.2
  Top Layer w15: RP3.2 1025,2344.88 1052.1,2317.78 R15.2
NetR16_2: R16.2 RP4.2 | length 199.8
  Top Layer w15: RP4.2 608.29,2353.82 608.29,2314.25 635,2287.54 635,2177.9 R16.2
NetR17_1: R17.1 RP5.2 | length 191.6
  Top Layer w15: RP5.2 1667.1,1340.24 1705,1378.14 R17.1
NetR18_1: R18.1 RP6.2 | length 199
  Top Layer w15: R18.1 2037.04,1392.95 RP6.2
NetR19_2: R19.2 RP7.2 | length 205.2
  Top Layer w15: R19.2 2037.04,2309.15 RP7.2
NetR20_2: R20.2 RP8.2 | length 199.5
  Top Layer w15: RP8.2 1675,2358.07 1710,2323.07 R20.2
NetR21_1: R21.1 RP9.2 | length 186.9
  Top Layer w15: RP9.2 2742.9,1387.9 R21.1@2742.9,1500
NetR22_1: R22.1 RP10.2 | length 190.2
  Top Layer w15: R22.1 3055,1497.1 3055,1392.9 RP10.2
NetR23_2: R23.2 RP11.2 | length 210.2
  Top Layer w15: R23.2 3054.94,2195 3115.8,2255.85 RP11.2
NetR24_2: R24.2 RP12.2 | length 193.6
  Top Layer w15: RP12.2 2697.9,2250 2742.9,2205 R24.2
NetR25_2: R25.2 RP1.1 U1.2 | length 415.5
  Top Layer w15: RP1.1 680,1362.1 680,1552.9 704.6,1577.5 709.6,1577.5 727.1,1595 R25.2 720,1607.1 720,1709.49 720.92,1710.41 U1.2
NetR26_2: R26.2 RP2.3 U1.6 | length 425.7
  Top Layer w10: U1.6 824.76,1733.29 824.76,1700.24 847.1,1677.9 R26.2 847.1,1595 921.1,1521 921.1,1351 RP2.3
NetR27_1: R27.1 RP3.1 U1.9 | length 446.9
  Top Layer w15: U1.9 823.28,2061.18 852.1,2090 R27.1 852.1,2100 905,2152.9 905,2340 RP3.1
NetR28_1: R28.1 RP4.3 U1.13 | length 428.9
  Top Layer w15: RP4.3 702.1,2344.88 683.6,2326.38 683.6,2128.5 722.1,2090 R28.1 720.92,2083.82 U1.13
NetR29_2: R29.2 RP5.1 U2.2 | length 426.5
  Top Layer w15: RP5.1 1767.1,1448.51 1756.5,1459.12 1756.5,1556.5 1795,1595 R29.2 1793.81,1601.18 U2.2
NetR30_2: R30.2 RP6.3 U2.6 | length 455.7
  Top Layer w15: U2.6 1896.18,1633.82 1925,1605 1925,1600 R30.2@1925,1595 ; R30.2 1920,1595 1937.5,1577.5 1942.5,1577.5 1965,1555 1965,1386.72 1984.31,1367.41 1984.31,1345.69 RP6.3
NetR31_1: R31.1 RP7.1 U2.9 | length 466.5
  Top Layer w15: U2.9 1896.18,2016.64 1920,2040.46 R31.1 1920,2100 1937.5,2117.5 1962.5,2117.5 1980,2135 1980,2352.11 RP7.1
NetR32_1: R32.1 RP8.3 U2.13 | length 440.1
  Top Layer w15: RP8.3 1764.31,2359.31 1764.31,2337.59 1760,2333.28 1760,2146 1806,2100 R32.1 1806,2034.64 1793.81,2022.46 U2.13
NetR33_2: R33.2 RP9.1 U3.2 | length 421.8
  Top Layer w15: RP9.1 2779.4,1345.6 2779.4,1546.5 2817.9,1585 R33.2 2801.72,1606.18 U3.2
NetR34_2: R34.2 RP10.3 U3.6 | length 442.8
  Top Layer w15: U3.6 2904.08,1680.92 2927.9,1657.1 2927.9,1585 2945.4,1567.5 2950.4,1567.5 2975,1542.9 2975,1388.01 3012.9,1350.12 RP10.3
NetR35_1: R35.1 RP11.1 U3.9 | length 471
  Top Layer w15: U3.9 2904.08,2071.18 2937.9,2105 R35.1 2937.9,2115 2995,2172.1 2995,2354.2 RP11.1
NetR36_1: R36.1 RP12.3 U3.13 | length 455.1
  Top Layer w15: RP12.3 2794.4,2371.5 2794.4,2153.5 2832.9,2115 R36.1 2832.9,2046.64 2801.72,2015.46 U3.13
NetR37_2: R37.2 U1.3 | length 212
  Top Layer w15: R37.2 612.1,1710 629.6,1727.5 629.6,1732.5 677.85,1780.74 736.95,1780.74 745.99,1771.7 745.99,1735.28 U1.3
NetR38_2: R38.2 U1.5 | length 251
  Top Layer w15: R38.2 615.59,1808.49 663.49,1808.49 665.23,1810.23 764.77,1810.23 797.17,1777.83 797.17,1735.28 U1.5
NetR39_1: R39.1 U1.10 | length 243.6
  Top Layer w15: R39.1 673.3,1889.11 674.15,1888.26 773.26,1888.26 797.17,1912.17 797.17,1954.72 U1.10
NetR40_1: R40.1 U1.12 | length 209.1
  Top Layer w15: R40.1 612.1,1980 682.85,1909.26 736.95,1909.26 745.99,1918.3 745.99,1954.72 U1.12
NetR41_2: R41.2 U2.3 | length 259
  Top Layer w15: R41.2 1722.5,1719.11 1740.73,1737.34 1740.73,1785.73 1750,1795 1810.1,1795 1818.89,1786.21 1818.89,1740.28 U2.3
NetR42_2: R42.2 U2.5 | length 261.7
  Top Layer w15: R42.2 1678.26,1816 1839,1816 1870.07,1784.93 1870.07,1740.28 U2.5
NetR43_1: R43.1 U2.10 | length 267.6
  Top Layer w15: R43.1 1687.37,1879 1834,1879 1870.07,1915.07 1870.07,1959.72 U2.10
NetR44_1: R44.1 U2.12 | length 225.9
  Top Layer w15: R44.1 1675,1985 1758.79,1901.21 1790.03,1901.21 1818.89,1930.07 1818.89,1959.72 U2.12
NetR45_2: R45.2 U3.3 | length 211.4
  Top Layer w15: R45.2 2682.9,1714.11 2744.54,1775.74 2810.98,1775.74 2826.79,1759.93 2826.79,1730.28 U3.3
NetR46_2: R46.2 U3.5 | length 248.8
  Top Layer w15: R46.2 2833.8,1804.11 2877.97,1759.93 2877.97,1730.28 U3.5
NetR47_1: R47.1 U3.10 | length 242.3
  Top Layer w10: R47.1 2682.14,1890.76 2845.12,1890.76 2877.01,1922.64 2877.01,1948.76 U3.10
NetR48_1: R48.1 U3.12 | length 215.1
  Top Layer w10: R48.1 2682.9,1985 2761.14,1906.76 2809.94,1906.76 2825.83,1922.64 2825.83,1948.76 U3.12
NetR49_2: R49.2 RST.1 | length 128.1
  Top Layer w15: R49.2 2600,100 2680,20 RST.1
NetR50_2: 5.3.C R50.2 | length 125.2
  Top Layer w30: 5.3.C 244.44,529.44 R50.2
NetR51_2: 0.7.C R51.2 | length 125.9
  Top Layer w30: 0.7.C 121.11,622.78 243.89,622.78 R51.2
NetR52_2: 4.5.C R52.2 | length 127.1
  Top Layer w30: 4.5.C 122.5,715.83 242.5,715.83 R52.2
NetR53_2: POWER.C R53.2 | length 125
  Top Layer w30: POWER.C R53.2
NetR57_2: 3.4.1 R57.2 | length 107.1
  Top Layer w15: R57.2@2260,446.95 2260,440 2262.5,437.5 2269.45,437.5 3.4.1@2332.85,374.11
NetR58_2: 3.2.1 R58.2 | length 128.5
  Top Layer w15: R58.2 2605,455 2622.5,437.5 2627.5,437.5 2690.89,374.11 3.2.1@2695,374.11
NetR59_2: 4.0.1 R59.2 | length 128.1
  Top Layer w15: R59.2@2240,100 2320,20 4.0.1 ; R59.2@2255,95 R59.2@2255,100
RST: R49.1 U4.17 | length 1703.6
  Top Layer w10: U4.17 1115,211.73 1128.99,197.74 1128.99,196.01 1225,100 2125,100 2270,-45 2355,-45 R49.1@2597.5,197.5
VCC5V: 0.7.A 4.5.A 5.3.A C25.1 C26.1 C27.1 C28.1 C29.1 HS_SPI_2.1 P3.1 P16.1 POWER.1 POWER.A TOF1.1 TOF2.1 U1.4 U2.4 U3.4 U4.2 | length 9922.2
  Top Layer w15: v2(770,1665) 772.1,1667.1 U1.4 ; U2.4 1845,1669.47 1855,1659.47 v2(1855,1650) ; U3.4 2852.9,1667.1 v2(2865,1655) v2@2875,1645
  Top Layer w30: C25.1 34.38,165.39 34.38,269.61 C26.1 ; C25.1@39.89,165 50,154.89 POWER.1 167,-77 813,-77 871.15,-18.85 871.15,16.15 HS_SPI_2.1 970,-55 1250,-55 1353.09,48.09 v2(1743.09,48.09) ; P3.1 30,1215 30,1025 ; v2(176.5,1166.5) 171.5,1166.5 30,1025 ; U4.2 95.67,325 40.67,270 C26.1 ; v2(326,1171) 329.83,1167.17 343.97,1167.17 346.14,1165 v2(590,1165) 593.83,1168.83 611.49,1168.83 780,1337.33 780,1649.59 770,1659.59 v2(770,1665) ; v2(940,1165) v2(1740,1165) ; TOF1.1 1990,310 2100,420 2100,860 TOF2.1 ; v2(1855,1650) 1857.5,1647.5 1857.5,1292.5 v2(1860,1290) ; v2(2075,1210) 2790,1210 2875,1295 v2@2875,1645 ; 30,1025 4.5.A 0.7.A 5.3.A POWER.A 32.38,432.62 32.38,272.38 C26.1
  Bottom Layer w30: v2(176.5,1166.5) 178.75,1168.75 323.75,1168.75 v2(326,1171) ; v2(590,1165) v2(940,1165) ; C27.1 705,1730 v2(770,1665) ; v2(1740,1165) 1740,1167.5 1860,1287.5 v2(1860,1290) 1930.21,1290 2010.21,1210 v2(2075,1210) ; v2(1743.09,48.09) 1744.04,49.04 1744.04,309.04 TOF1.1 ; C28.1 1774.88,1730.12 v2(1855,1650) ; C29.1 2774.88,1745.12 v2(2865,1655)
pads on no net: 3.2.2 3.2.3 3.4.2 3.4.3 4.0.2 4.0.3 P2.2 P2.10 RP1.3 RP2.1 RP3.3 RP4.1 RP5.3 RP6.1 RP7.3 RP8.1 RP9.3 RP10.1 RP11.3 RP12.1 RST.2 RST.3 U4.10 U4.11 U4.19 U4.20 U4.31 U4.33 U4.39 U4.40 U4.42 螺丝孔2.1 螺丝孔3.1 螺丝孔4.1
copper on no net: | length 5
  Top Layer w10: 2281,540 2281,545

## Polygon pours and split planes (outlines as drawn)
GND on Bottom Layer "NONET_L-01_P-001" (solid, pour order 0): -40,2700 75,2815 3290,2815 3385,2720 3385,-50 3340,-95 10,-95 -50,-35

## Other copper
Top Layer:
  region net GND: 3140,1925 3240,1925 3240,1770 3140,1770
  region net GND: 2140,1945 2250,1945 2250,1770 2140,1770
  region net GND: 1080,1925 1095,1940 1180,1940 1180,1775 1075,1775 1075,1940 1180,1940
  text "浙江工商大学" at 2735,1035.11 h118.11
  text "." at 2041.84,1004 h20
  text "江心一号" at 2925,879.74 h118.11
  text "2024/5/15" at 2890,746.25 h118.11

## Silkscreen, mask and mechanical layers (free items; w line width, h text height)
Top Overlay:
  text "3-G-G-4-5" at -20,2680 h40
  text "NC-G-G-10-NC" at 2335,2680 h40
  text "9--8-G-12-11" at 2340,2600 h40
  text "2-1-G-7-6" at -20,2590 h40
  text "N2-N3" at 1330,1995 h60 r90
  text "N6-N7" at 2390,1985 h60 r90
  text "0.2-0.1" at 1279,1981 h30 r90
  text "N10-N11" at 3375,1980 h60 r90
  text "1.3-0.5" at 2344,1976 h30 r90
  text "1.6-1.7" at 3319,1976 h30 r90
  text "接近开关" at -25,1539.27 h50
  text "N1-N4" at 219,1336 h30 r90
  text "N5-N8" at 1300,1320 h60 r90
  text "0.3-0.4" at 269,1311 h30 r90
  text "0.6-0.0" at 1344,1306 h30 r90
  text "1.4-1.5" at 2389,1306 h30 r90
  text "N9-N12" at 2345,1295 h60 r90
  text "V-5.2-G" at 2,1223 h40 r90
  text "2.1" at 2133,888 h40
  text "5.0" at 2123,803 h40
  text "3.3-4.4-4.2-3.5-G--V" at 1938,392 h30 r90
  text "V--G--4.1-3.6-5.1-3.7" at 1678,287 h30 r90
  text "2.2-2.4-2.3-2.5-G--V" at 331,-69 h30
  text "1.0-1.1--G--V" at 1001,-69 h30
  text "V-G" at 30,-85 h50
Mechanical 1:
  lines w10: -60,2725.92 -60,-29.99 ccw(c16.79,-33.21) 20,-110 3315,-110 ccw(c3319.64,-34.64) 3395,-30 3395,2715.51 ccw(c3284.17,2714.68) 3285,2825.51 35,2825.51 ccw(c33.75,2731.76) -60,2730.51